# EAGLE board Laser Driver Rev B.brd (EAGLE 7.2.0)
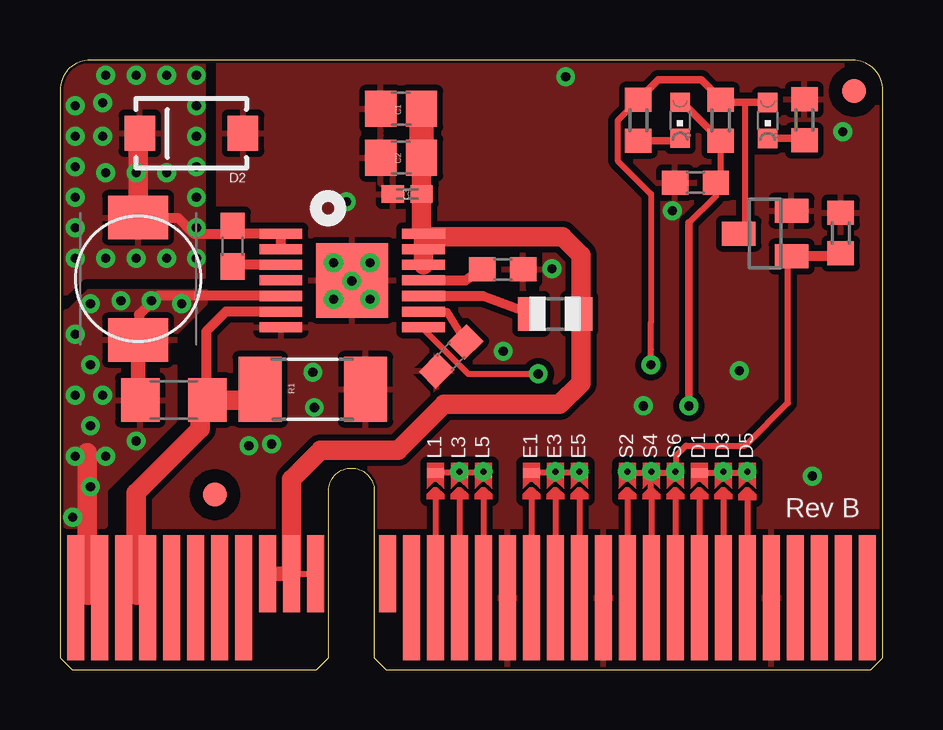
[diagram p0: board, top side]
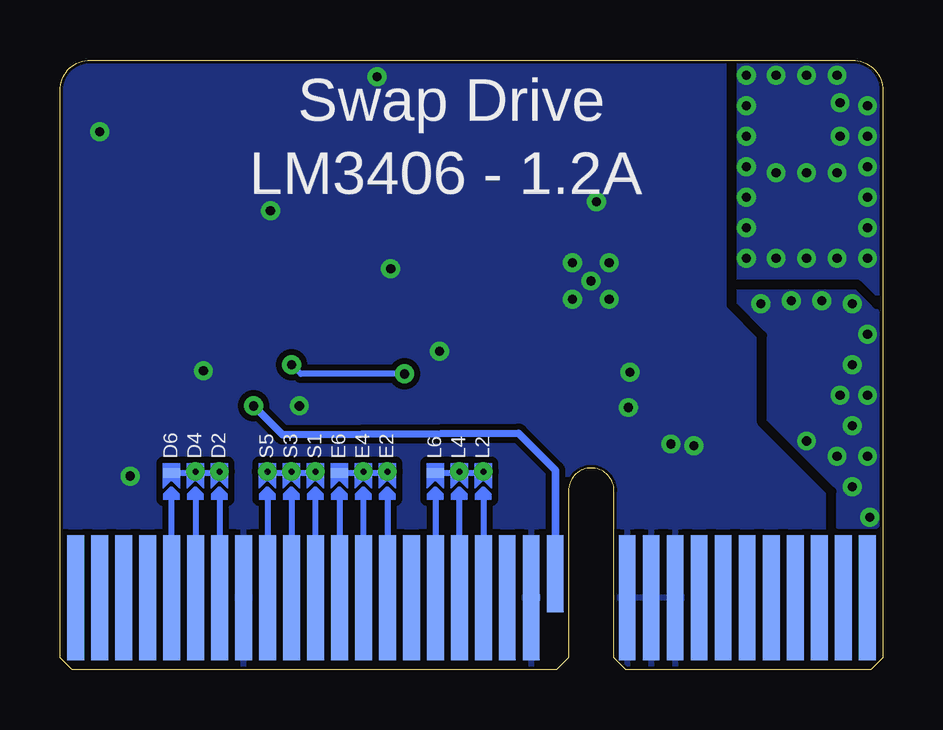
[diagram p1: board, bottom side, seen from below]

Size 34.3 x 25.4 mm. Coordinates in mm from the lower left corner, seen from the top.
Outline: 34.3,8.4 34.3,24.13 arc90 33.03,25.4 1.27,25.4 arc90 0,24.13 0,8.4
Copper layers (1*16): Top 0.035mm / dielectric 1.5mm / Bottom 0.035mm
Design rules "default *": minimum track width 10mil, minimum drill 24mil, track to track 10mil, track to pad 10mil, pad to pad 8mil, via to via 8mil, smd to smd 8mil, copper to edge 5mil, drill to drill 8mil, minimum pad ring 10mil, minimum via ring 8mil, stop-mask expansion 5mil, vias tented up to drill 250mil, thermal gap 10mil
tRestrict: 3 lines
bRestrict: 8 lines

## Footprints (pad centres in the part's own frame; a part is rotated, then mirrored left to right if it is on the bottom)
SOT23 = smd 1 x 1.4: 1 -0.95,-1.1; 2 0.95,-1.1; 3 0,1.1
C0805 = smd 1.3 x 1.5: 1 -0.85,0; 2 0.85,0
C0402K = smd 0.925 x 0.74: 1 -0.6,0; 2 0.6,0
C0603 = smd 1.1 x 1: 1 -0.85,0; 2 0.85,0
C1206 = smd 1.6 x 1.8: 1 -1.4,0; 2 1.4,0
SMA-DIODE = smd 1.27 x 1.47: A -2.15,0; C 2.15,0
CHIPLED_0603 = smd 0.8 x 0.8: A 0,-0.75; C 0,0.75
R2010 = smd 1.8 x 2.7: 1 -2.2,0; 2 2.2,0
R0603 = smd 1 x 1.1: 1 -0.85,0; 2 0.85,0
R0805 = smd 1.1 x 1.4: 1 -1,0; 2 1,0
HTSSOP-14 = smd 0.42 x 1.78: P$1 -1.95,-2.97; P$2 -1.3,-2.97; P$3 -0.65,-2.97; P$4 0,-2.97; P$5 0.65,-2.97; P$6 1.3,-2.97; P$7 1.95,-2.97; P$8 1.95,2.97; P$9 1.3,2.97; P$10 0.65,2.97; P$11 0,2.97; P$12 -0.65,2.97; P$13 -1.3,2.97; P$14 -1.95,2.97 | smd 3.1 x 3: P$15 0,0
PCIE_64_SMART_BOARD = smd 0.7 x 5.2 bottom: GND@1 8.65,3; GND@2 9.65,3; GND@3 10.65,3; P$1 0.65,3; P$2 1.65,3; P$3 2.65,3; P$4 3.65,3; P$5 4.65,3; P$6 5.65,3; P$7 6.65,3; P$8 7.65,3; P$13 14.65,3; P$14 15.65,3; P$15 16.65,3; P$16 17.65,3; P$17 18.65,3; P$18 19.65,3; P$19 20.65,3; P$20 21.65,3; P$21 22.65,3; P$22 23.65,3; P$23 24.65,3; P$24 25.65,3; P$25 26.65,3; P$26 27.65,3; P$27 28.65,3; P$28 29.65,3; P$29 30.65,3; P$30 31.65,3; P$31 32.65,3; P$32 33.65,3 | smd 0.7 x 3.2 bottom: P$12 13.65,4 | smd 0.7 x 0.4 bottom: P$15@1 16.65,8.2; P$16@1 17.65,8.2; P$17@1 18.65,8.2; P$19@1 20.65,8.2; P$20@1 21.65,8.2; P$21@1 22.65,8.2; P$22@1 23.65,8.2; P$23@1 24.65,8.2; P$24@1 25.65,8.2; P$26@1 27.65,8.2; P$27@1 28.65,8.2; P$28@1 29.65,8.2 | smd 0.7 x 5.2: P$33 0.65,3; P$34 1.65,3; P$35 2.65,3; P$36 3.65,3; P$37 4.65,3; P$38 5.65,3; P$39 6.65,3; P$40 7.65,3; P$45 14.65,3; P$46 15.65,3; P$47 16.65,3; P$48 17.65,3; P$49 18.65,3; P$50 19.65,3; P$51 20.65,3; P$52 21.65,3; P$53 22.65,3; P$54 23.65,3; P$55 24.65,3; P$56 25.65,3; P$57 26.65,3; P$58 27.65,3; P$59 28.65,3; P$60 29.65,3; P$61 30.65,3; P$62 31.65,3; P$63 32.65,3; P$64 33.65,3 | drill 0.254 pad 0.305: P$41 21.65,8.25; P$42 17.65,8.25; P$43 16.65,8.25; P$65 20.65,8.25; P$66 23.65,8.25; P$67 24.65,8.25; P$68 27.65,8.25; P$69 28.65,8.25; P$70 25.65,8.25 | smd 0.7 x 3.2: P$44 13.65,4; VCC@1 8.65,4; VCC@2 9.65,4; VCC@3 10.65,4 | smd 0.7 x 0.4: P$46@1 15.65,8.2; P$47@1 16.65,8.2; P$48@1 17.65,8.2; P$50@1 19.65,8.2; P$51@1 20.65,8.2; P$52@1 21.65,8.2; P$54@1 23.65,8.2; P$55@1 24.65,8.2; P$56@1 25.65,8.2; P$57@1 26.65,8.2; P$58@1 27.65,8.2; P$59@1 28.65,8.2
FIDUCIAL_1MM = smd 1 x 1: 1 0,0
LQH55 = smd 1.8 x 2.5: 1 -2.55,0; 2 2.55,0

## Placement (x,y rotation side)
2N7002P  [SOT23]  29.4,18.17 90 top
C1  10uf  [C0805]  14.22,23.37 180 top
C2  10uf  [C0805]  14.22,21.34 180 top
C3  [C0402K]  14.48,19.81 180 top
C11  .1uf  [C0603]  26.49,20.29 0 top
CB  22nf  [C0603]  7.21,17.64 90 top
CC  100nf  [C0603]  16.3,13.05 45 top
CF  100nf  [C0603]  18.46,16.67 180 top
CO  [C1206]  4.75,11.23 0 top
D2  B340A  [SMA-DIODE]  5.48,22.35 180 top
GRN  [CHIPLED_0603]  25.85,22.89 180 top
R1  .166  [R2010]  10.54,11.68 180 top
R3  460  [R0603]  31.04,22.91 90 top
R6  10k  [R0603]  32.55,18.19 270 top
R7  460  [R0603]  27.54,22.89 270 top
R9  460  [R0603]  24.11,22.89 90 top
R-ON  148k  [R0805]  20.65,14.82 0 top
RED  [CHIPLED_0603]  29.5,22.88 180 top
U$1  LM3406  [HTSSOP-14]  12.18,16.22 270 top
U$2  [PCIE_64_SMART_BOARD]  0,0 0 top
U$5  FIDUCIAL  [FIDUCIAL_1MM]  6.46,7.29 0 top
U$6  FIDUCIAL  [FIDUCIAL_1MM]  33.1,24.1 0 top
U$7  L-13uH  [LQH55]  3.26,16.29 270 top

## Library data of the parts
2N7002P C1-C3 C11 CB CC CF CO GRN R1 R3 R6 R7 R9 R-ON RED U$5-U$7 = adafruit
D2 = SparkFun-DiscreteSemi; PROD_ID: DIO-09886
U$1 U$2 = PocketNC

## Nets
3V: C11.2 GRN.A R7.2 U$2.P$12
DIR: U$2.P$57@1
ENBL-IN: 2N7002P.1 R6.2 U$2.P$22@1
ENBL-OUT: 2N7002P.3 R7.1 R9.2 RED.A U$1.P$8
GND: 2N7002P.2 C1.2 C2.2 C3.2 C11.1 CC.1 CF.1 D2.A R1.1 R3.2 R6.1 U$1.P$7 U$1.P$15 U$2.GND@1 U$2.GND@2 U$2.GND@3 U$2.P$13 U$2.P$25 U$2.P$49 U$2.P$53 U$2.P$60
LS+: CO.1 U$1.P$5 U$2.P$33 U$2.P$34 U$7.2
LS-: CO.2 R1.2 U$1.P$6 U$2.P$35 U$2.P$36
N$1: CB.1 U$1.P$3
N$8: GRN.C R9.1
N$10: R3.1 RED.C
N$11: CC.2 U$1.P$9
N$14: CF.2 U$1.P$11
RON: R-ON.1 U$1.P$10
SCL: U$2.P$45
SDA: U$2.P$14
SW: CB.2 D2.C U$1.P$1 U$1.P$2 U$7.1
VCC: C1.1 C2.1 C3.1 R-ON.2 U$1.P$12 U$1.P$13 U$1.P$14 U$2.VCC@1 U$2.VCC@2 U$2.VCC@3

## Tracks (layer width: path | path; a pad name or v marks a point on that pad's centre or on a via)
3V  (via drill 0.38)
  Top 0.254: 26.23,18.61 27.34,19.73 C11.2 27.54,20.49 R7.2
  Top 0.305: GRN.A 25.94,23.64 R7.2 | v26.23,10.99 26.23,18.61
  Bottom 0.305: U$2.P$12 13.65,8.32 15.18,9.84 25.02,9.78 v26.23,10.99
ENBL-IN  (1 unrouted)
  Top 0.254: 25.7,8.2 25.7,8.94 26.1,9.34 28.57,9.34 30.35,11.11 30.35,16.95 2N7002P.1
  Top 0.406: R6.2 32.17,17.22 2N7002P.1
ENBL-OUT  (via drill 0.38)
  Top 0.254: 2N7002P.3 28.57,18.45 28.57,23.63 | R9.2 23.24,22.87 23.24,21.21 24.64,19.81 24.64,14.48 24.64,13.34 v24.64,12.7 | 15.2,14.27 15.2,14.14 17.02,12.32 v19.94,12.32
  Top 0.305: RED.A 28.57,23.63 27.65,23.63 R7.1 27.54,23.77 26.73,24.57 24.94,24.57 R9.2 | U$1.P$8 15.2,14.27
  Bottom 0.254: v19.94,12.32 24.26,12.32 v24.64,12.7
GND  (via drill 0.38)
  other vias: 20.51,16.7 31.37,8.06 21.08,24.7 11.94,19.49 28.32,12.45 24.32,10.99 7.87,9.33 8.83,9.4 10.54,12.38 10.6,10.92 12.17,16.19 11.4,16.95 12.93,16.95 12.93,15.43 11.4,15.43 25.53,19.11 32.64,22.42 18.48,13.27
  pour Top: 0,0 0,25.4 34.3,25.4 34.3,0
  pour Bottom: 34.3,0 34.3,25.4 0,25.4 0,0
LS+  (via drill 0.38)
  Top 0.406: U$2.P$33 1.14,3 1.14,4.06 | U$1.P$5 4.07,15.57 3.3,14.8 3.3,13.78 U$7.2
  Top 0.61: U$7.2 3.26,11.06 CO.1 | U$2.P$34 1.14,3
  Top 0.813: 1.14,4.06 1.14,9.03
  other vias: 0.53,6.35 5.08,15.24 3.81,15.37 2.54,15.37 1.27,15.24 0.64,13.97 1.27,12.7 0.64,11.43 1.27,10.16 0.64,8.89 1.91,8.89 1.78,11.43 3.17,9.53 1.27,7.62
  pour Top: 6.05,15.29 6.05,15.8 1.17,15.8 0.25,14.88 0.25,5.99 1.88,5.99 1.88,7.52 4.78,10.41 4.78,14.02
  pour Bottom: 0.25,5.99 0.25,14.88 1.17,15.8 6.05,15.8 6.05,15.29 4.78,14.02 4.78,10.41 1.88,7.52 1.88,5.99
LS-
  Top 0.406: U$2.P$35 3.17,3 3.17,3.81 | U$1.P$6 6.92,14.92 6.1,14.1 6.1,11.03 CO.2
  Top 0.61: 6.14,10.97 CO.2 | U$2.P$36 3.17,3
  Top 0.813: 3.17,3.81 3.17,7.37 5.84,10.03 5.84,10.67 CO.2 7.89,11.23 R1.2
N$1
  Top 0.406: U$1.P$3 7.28,16.87 CB.1
N$4
  Top 0.254: 24.64,7.3 24.64,8.26
N$8
  Top 0.305: R9.1 25.75,22.04 GRN.C
N$10
  Top 0.305: RED.C 31.09,22.13 R3.1
N$11
  Top 0.305: U$1.P$9 16.13,14.92 CC.2
N$14
  Top 0.406: U$1.P$11 16.9,16.22 CF.2
RON
  Top 0.406: U$1.P$10 17.64,15.57 R-ON.1
SW  (via drill 0.38)
  Top 0.406: U$1.P$2 U$1.P$1 6.88,18.17 | U$7.1 3.3,18.8 4.95,18.8 5.58,18.17 6.88,18.17 | 6.88,18.17 CB.2
  Top 0.813: U$7.1 3.26,22.03 D2.C
  other vias: 0.64,17.14 5.69,17.14 5.69,18.41 0.64,18.41 0.64,19.68 0.64,20.95 5.69,19.68 5.69,20.95 4.45,20.7 3.17,20.7 1.91,20.7 0.64,22.23 5.69,22.23 0.64,23.5 1.91,24.77 3.17,24.77 4.45,24.77 5.69,24.77 5.69,23.5 4.45,17.14 3.17,17.14 1.91,17.14 1.78,23.62 1.78,22.23
  pour Top: 0.25,15.6 0.25,24.89 0.51,25.15 5.89,25.15 6.05,25.15 6.3,24.89 6.3,16.31 0.97,16.31
  pour Bottom: 0.25,15.6 0.25,24.89 0.51,25.15 6.05,25.15 6.05,16.31 0.97,16.31
VCC
  Top 0.254: U$2.VCC@2 U$2.VCC@3 | R-ON.2 21.65,14.8 21.72,14.73
  Top 0.61: U$2.VCC@1 U$2.VCC@2
  Top 0.813: U$2.VCC@2 9.65,7.94 10.86,9.14 14.1,9.14 16,11.05 20.83,11.05 21.72,11.94 21.72,14.73 21.72,17.27 20.95,18.03 15.15,18.03 | C2.1 C3.1 15.08,18.24 U$1.P$14 15.15,18.03 | 15.15,18.03 U$1.P$13 U$1.P$12
  Top 1.016: C1.1 C2.1

## Text on the board
tNames: Rev B
bNames: Swap Drive | LM3406 - 1.2A